# Altium PCB Brake_PCB_v2.PcbDoc
Units mm, origin at the board's own origin, x right, y up, seen from the top; angles counter-clockwise.
Board outline 86.5 x 99 mm, 2 copper layers (Top Layer, Bottom Layer); 48 components, 46 nets, 246 pads, 69 vias.
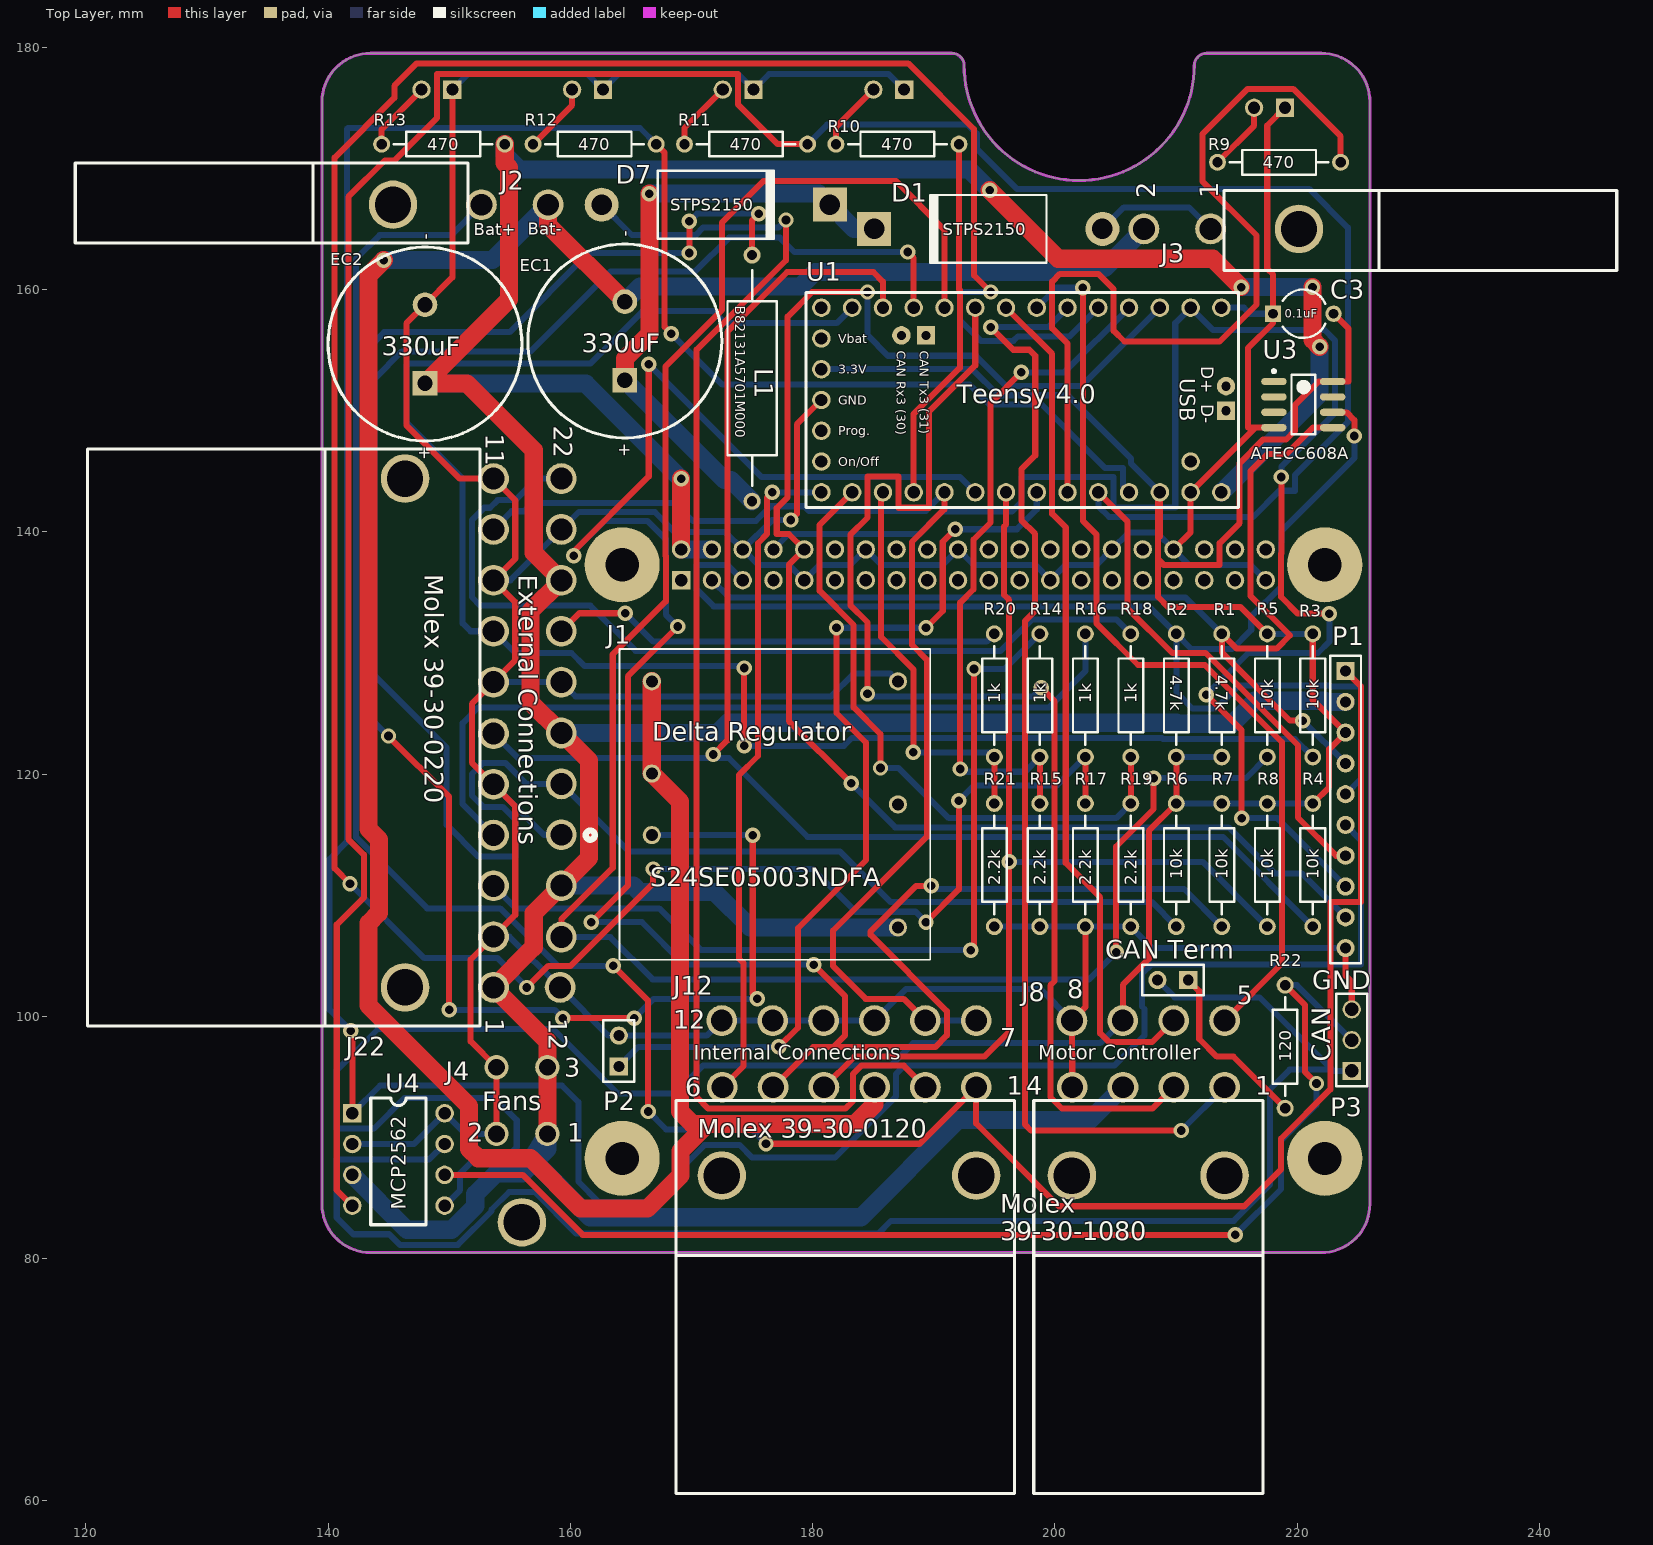
[diagram p0: Top Layer view]
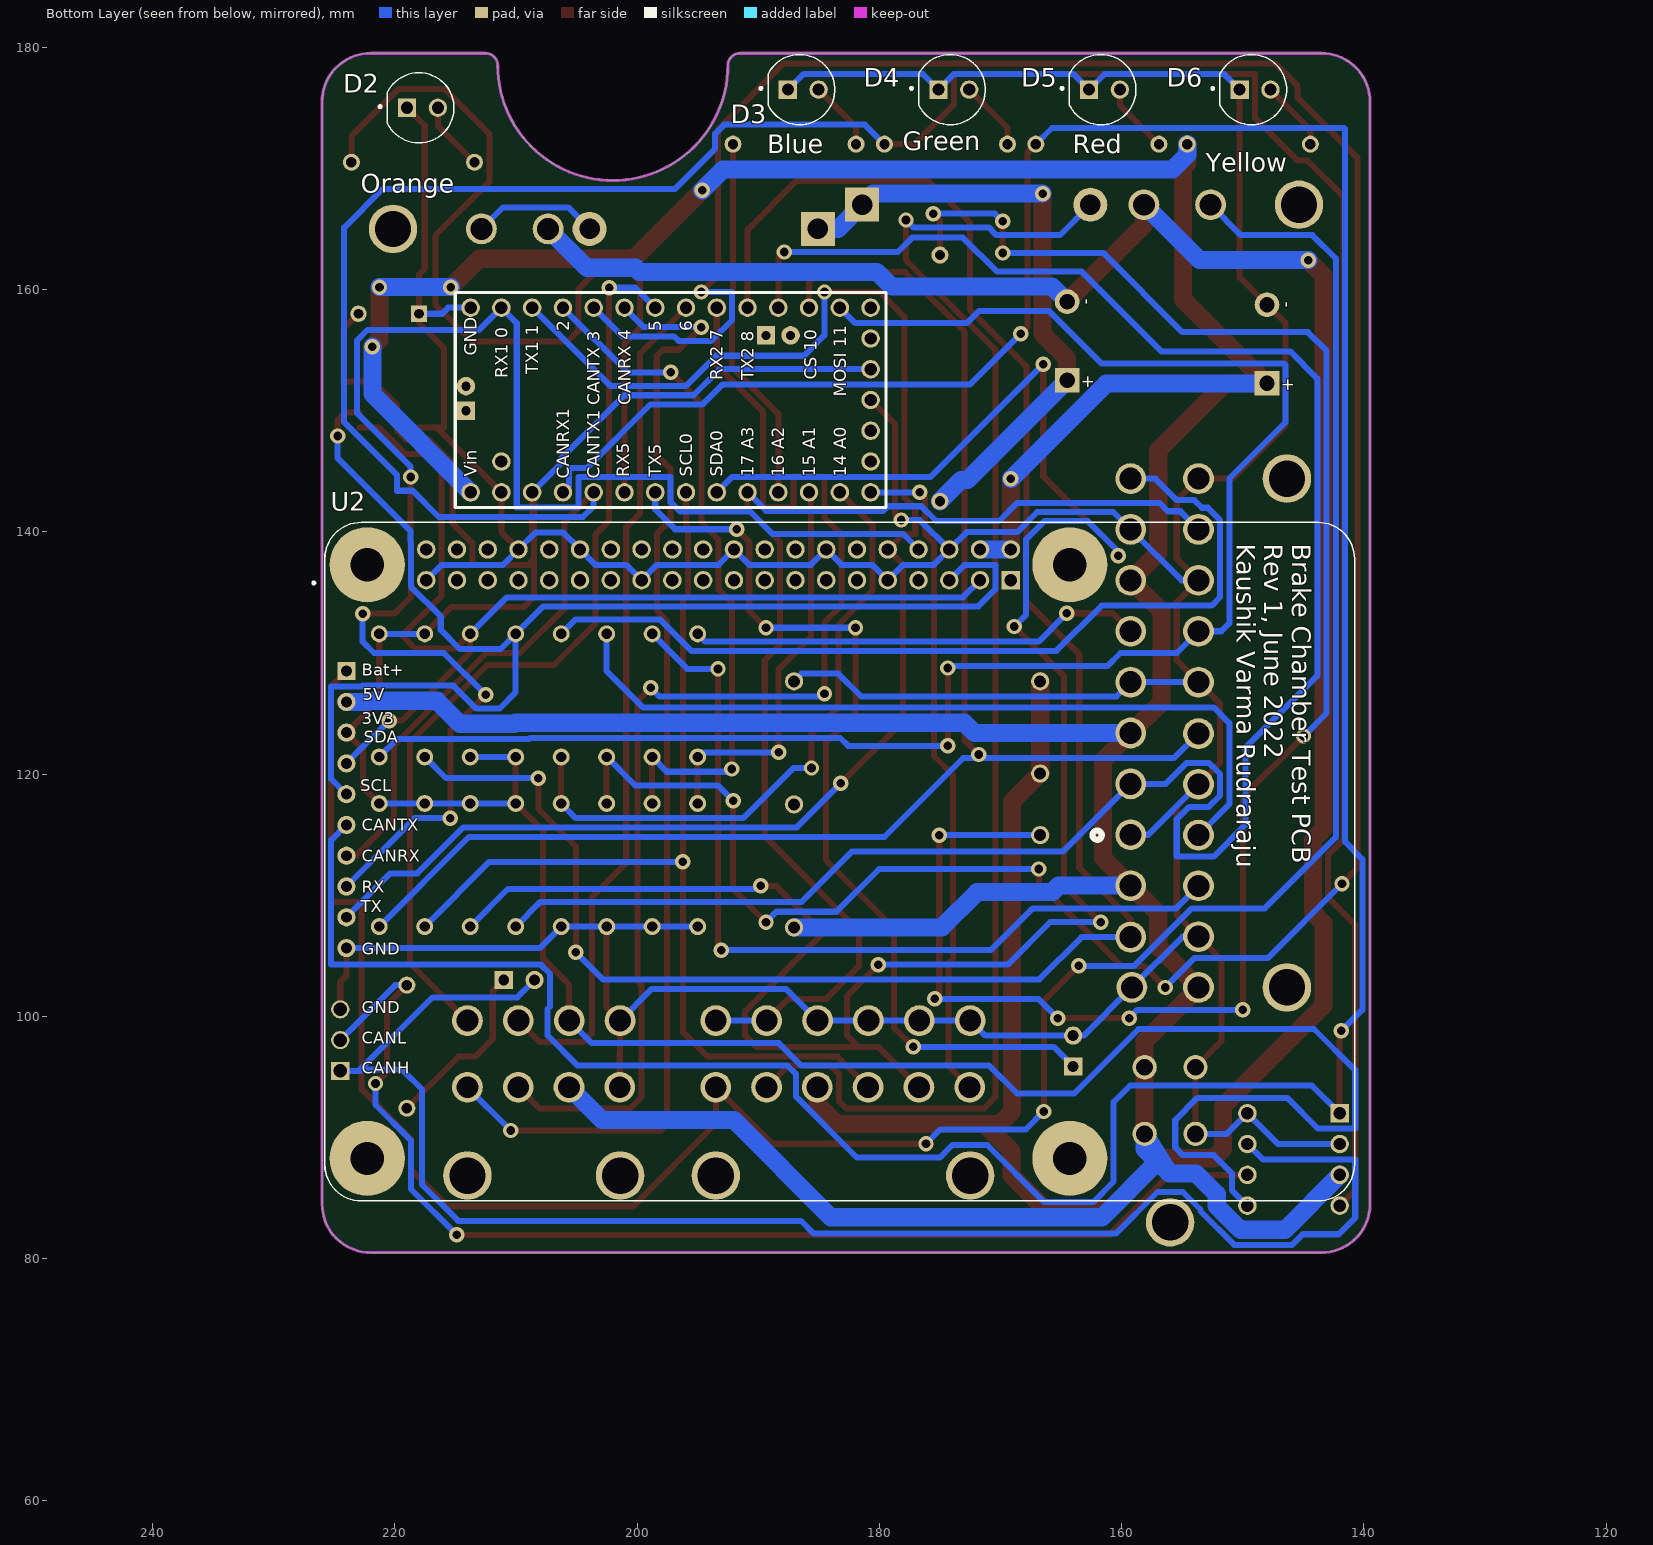
[diagram p1: Bottom Layer view, seen from below]

## Layer stack, top to bottom
Top Solder: solder mask 0.0102, Solder Resist, Dk 3.5
Top Layer: signal copper 0.0356
Dielectric 1: dielectric 0.32, FR-4, Dk 4.8
Bottom Layer: signal copper 0.0356
Bottom Solder: solder mask 0.0102, Solder Resist, Dk 3.5

## Board outline
139.5,84.5 139.5,175.5 cw(c143.5,175.5) 143.5,179.5 191.5,179.5 cw(c191.5,178.5) 192.5,178.5 ccw(c202,178.5) 211.5,178.5 cw(c212.5,178.5) 212.5,179.5 222,179.5 cw(c222,175.5) 226,175.5 226,84.504 225.996,84.504 cw(c221.996,84.504) 221.996,80.504 221.996,80.5 143.5,80.5 cw(c143.5,84.5)

## Design rules (kind name [scope] priority, off if disabled: settings)
Clearance [All] p1: gap=0.254 ignorepadtopadclearanceinfootprint=FALSE except(0: Arc-Hole Track-Hole SMDPad-Hole THPad-Hole Via-Hole Fill-Hole Poly-Hole Region-Hole Text-Hole)
PolygonConnect [All] p1: connectstyle=Relief reliefconductorwidth=0.254 reliefentries=4 polygonreliefangle="90 Angle" airgapwidth=0.254
RoutingVias [All] p1: holewidth=0.711 width=1.27 viastyle="Through Hole" minholewidth=0.711 minwidth=1.27 maxholewidth=0.711 maxwidth=1.27
SolderMaskExpansion [All] p1: expansion=0.102 istentingtop=FALSE
Width 5V [InNet('5V')] p1: maxlimit=2 minlimit=0.254 preferedwidth=1.5 minimp=50.000000 maximp=50.000000 favimp=50.000000
Width D12 [InNet('NetD1_2')] p2: maxlimit=2 minlimit=0.254 preferedwidth=1.5 minimp=50.000000 maximp=50.000000 favimp=50.000000
Width Bat- [InNet('Bat -')] p3: maxlimit=2 minlimit=0.254 preferedwidth=1.5 minimp=50.000000 maximp=50.000000 favimp=50.000000
Width [All] p4: maxlimit=0.75 minlimit=0.4 preferedwidth=0.5 minimp=50.000000 maximp=50.000000 favimp=50.000000
30 further rules are at their usual default settings.

## Components (designator, comment, footprint, x,y, rotation, side; value= is the part's Value field where it differs from the comment)
C3 "0.1uF" CAPR5-4X5 220.5,158 r0 top
"CAN Term" "Header 2" HDR1X2 211,103 r180 top
D1 "STPS2150" DO-201AD 194.5,165 r180 top
D2 "Orange" LED_151054RS03000 217.715,175 r180 bottom
D3 "Blue" LED_151054RS03000 186.282,176.5 r180 bottom
D4 "Green" LED_151054RS03000 173.85,176.5 r180 bottom
D5 "Red" LED_151054RS03000 161.417,176.5 r180 bottom
D6 "Yellow" LED_151054RS03000 148.985,176.5 r180 bottom
D7 "STPS2150" DO-201AD 172,167 r0 top
EC1 "330uF" "Cap - 15mm Polarized" 164.5,155.75 r90 top
EC2 "330uF" "Cap - 15mm Polarized" 148,155.5 r90 top
J1 "S24SE05003NDFA" CONN6_3NDFA_DEA 166.723,114.96 r0 top
J2 "Battery Power" "2 pos Mini-Fit Jr. R/A Header" 152.66,167 r270 top
J3 "Motor Power" "2 pos Mini-Fit Jr. R/A Header" 212.845,165 r90 top
J4 "Fans" "4 POS MINI-FIT JR" 158.1,90.3 r0 top
J8 "Motor Controller" "8 pos Mini-Fit Jr. R/A Header" 214,94.155 r0 top
J12 "Internal Connections" "12 pos Mini-Fit Jr. R/A Header" 193.5,94.155 r0 top
J22 "External Connections" "22 pos Mini-Fit Jr. R/A Header" 153.655,102.391 r270 top
L1 "B82131A5701M000" AXIAL-0.8 175,152.684 r270 top
P1 "Header 10" HDR1X10 223.992,128.5 r270 top
P2 "Header 2" HDR1X2 164,95.87 r90 top
P3 "Header 3" HDR1X3 224.5,95.5 r90 top
R1 "4.7k" AXIAL-0.4 213.773,126.494 r270 top value=10K
R2 "4.7k" AXIAL-0.4 210.019,126.494 r270 top value=10K
R3 "10k" AXIAL-0.4 221.283,126.494 r90 top value="10 K"
R4 "10k" AXIAL-0.4 221.283,112.494 r90 top value="10 K"
R5 "10k" AXIAL-0.4 217.528,126.494 r90 top value="10 K"
R6 "10k" AXIAL-0.4 210.019,112.494 r90 top value="10 K"
R7 "10k" AXIAL-0.4 213.773,112.494 r90 top value="10 K"
R8 "10k" AXIAL-0.4 217.528,112.494 r90 top value="10 K"
R9 "470" AXIAL-0.4 218.5,170.5 r0 top value="470 R"
R10 "470" AXIAL-0.4 187,172 r0 top value="470 R"
R11 "470" AXIAL-0.4 174.5,172 r0 top value="470 R"
R12 "470" AXIAL-0.4 162,172 r0 top value="470 R"
R13 "470" AXIAL-0.4 149.5,172 r0 top value="470 R"
R14 "1k" AXIAL-0.4 198.755,126.494 r90 top value=1K
R15 "2.2k" AXIAL-0.4 198.755,112.494 r90 top value="2.2 K"
R16 "1k" AXIAL-0.4 202.509,126.494 r90 top value=1K
R17 "2.2k" AXIAL-0.4 202.509,112.494 r90 top value="2.2 K"
R18 "1k" AXIAL-0.4 206.264,126.494 r90 top value=1K
R19 "2.2k" AXIAL-0.4 206.264,112.494 r90 top value="2.2 K"
R20 "1k" AXIAL-0.4 195,126.494 r90 top value=1K
R21 "2.2k" AXIAL-0.4 195,112.494 r90 top value="2.2 K"
R22 "120" AXIAL-0.4 219,97.5 r90 top
U1 "Teensy 4.0" "Teensy 4.0" 180.72,158.5 r270 top
U2 "RASPBERRYPI4_4GB" "Mirrored MODULE_RASPBERRY_PI_3_MODEL_B" 183.275,112.775 r180 bottom locked
U3 "ATECC608A" SOIC-8 220.5,150.5 r0 top
U4 "MCP2562" DIP8 141.999,92 r0 top

## Footprints (in the part's own frame and the unit in brackets; to place one, negate y for a bottom-side part, rotate by r counter-clockwise, add the part's x,y. Pads: shape width x height; smd on the part's side, far side on the other; paste and mask are expansions set on the pad)
"2 pos Mini-Fit Jr. R/A Header" [mm] "Molex 2 position Mini-Fit Jr. Right Angle Header with Pegs, Series 5569"
  round 4 hole 3: 0(0,-7.3)
  round 2.54 hole 1.803: 1(0,0) 2(0,5.5)
  silkscreen extent -3.43,-33.53 3.17,-1.1
"4 POS MINI-FIT JR" [mm] "Vertical Header"
  round 4 hole 3: 0(-2.1,-7.3)
  round 2 hole 1.4: 1(0,0) 2(-4.2,0) 3(0,5.5) 4(-4.2,5.5)
"8 pos Mini-Fit Jr. R/A Header" [mm] "Molex 8 position Mini-Fit Jr. Right Angle Header with Pegs, Series 5569"
  round 4 hole 3: 0(-12.6,-7.3) 0(0,-7.3)
  round 2.54 hole 1.803: 1(0,0) 2(-4.191,0) 3(-8.382,0) 4(-12.573,0) 5(0,5.5) 6(-4.2,5.5) 7(-8.4,5.5) 8(-12.6,5.5)
  silkscreen extent -15.75,-33.53 3.17,-1.1
"12 pos Mini-Fit Jr. R/A Header" [mil] "Molex 12 position Mini-Fit Jr. Right Angle Header with Pegs, Series 5569"
  round 157.48 hole 118.11: 0(-826.77,-287.4) 0(0,-287.4)
  round 100 hole 71: 1(0,0) 2(-165,0) 3(-330,0) 4(-495,0) 5(-660,0) 6(-825,0) 7(0,216.54) 8(-165.35,216.54) 9(-330.71,216.54) 10(-496.06,216.54) 11(-661.42,216.54) 12(-826.77,216.54)
  silkscreen extent -975,-1320 125,-43
"22 pos Mini-Fit Jr. R/A Header" [mil] "Molex 22 position Mini-Fit Jr. Right Angle Header with Pegs, Series 5569"
  round 157.48 hole 118.11: 0(-1653.54,-287.4) 0(0,-287.4)
  round 100 hole 71: 1(0,0) 2(-165,0) 3(-330,0) 4(-495,0) 5(-660,0) 6(-825,0) 7(-992.12,0) 8(-1157.48,0) 9(-1322.83,0) 10(-1488.19,0) 11(-1653.54,0) 12(0,216.54) 13(-163.58,220.47) 14(-330.71,220.47) 15(-496.06,220.47) 16(-661.42,220.47) 17(-826.77,220.47) 18(-992.12,220.47) 19(-1157.48,220.47) 20(-1322.83,220.47) 21(-1488.19,220.47) 22(-1653.54,220.47)
  silkscreen extent -1750,-1320 125,-43
AXIAL-0.4 [mm] "Axial Device, Thru-Hole; 2 Leads; 0.4 in Pin Spacing"
  round 1.4 hole 0.85: 1(-5.08,0) 2(5.08,0)
  silkscreen extent -4.06,-1.02 4.06,1.02
AXIAL-0.8 [mm] "Axial Device, Thru-Hole; 2 Leads; 0.8 in Pin Spacing"
  round 1.4 hole 0.85: 1(-10.16,0) 2(10.16,0)
  silkscreen extent -8.89,-2.03 8.89,2.03
"Cap - 15mm Polarized" [mil] "15 MM DIA ALUMINUM ELECTROLYTIC CAPACITOR w/ 7.5mm hole spacing"
  rect 80x80 hole 50: 1(-127.95,0)
  round 80 hole 50: 2(127.95,0)
  silkscreen extent -315,-315 315,315
CAPR5-4X5 [mm] "Capacitor; 2 Leads"
  rect 1.35x1.35 hole 0.8: 1(-2.5,0)
  round 1.35 hole 0.8: 2(2.5,0)
  silkscreen extent -1.69,-2 1.82,2
CONN6_3NDFA_DEA [mil]
  round 59 hole 39: 1(0,0) 2(0,200) 3(0,500) 4(800,500) 5(800,100) 6(800,-300)
  silkscreen extent -215,-405 905,605, body extent 0,0 10,10, height 10
DIP8 [mil]
  rect 60x60 hole 40: 1(0,0)
  round 60 hole 40: 2(0,-100) 3(0,-200) 4(0,-300) 5(300,-300) 6(300,-200) 7(300,-100) 8(300,0)
  silkscreen extent 60,-362 240,50
DO-201AD [mm] "Diode, Axial; Body 9.5 x 5.6 mm (LxDia. max), Lead Dia. 1.32 mm (max)"
  round 2.8 hole 1.7: 1(-9.42,0)
  rect 2.8x2.8 hole 1.7: 2(9.42,0)
  silkscreen extent -4.8,-2.8 4.9,2.8
HDR1X2 [mm] "Connector; Header; 2 Position"
  rect 1.5x1.5 hole 0.9: 1(0,0)
  round 1.5 hole 0.9: 2(2.54,0)
  silkscreen extent -1.27,-1.27 3.81,1.27
HDR1X3 [mm] "Connector; Header; 3 Position"
  rect 1.5x1.5 hole 1.1: 1(0,0)
  round 1.5 hole 1.1: 2(2.54,0) 3(5.08,0)
  silkscreen extent -1.27,-1.27 6.35,1.27
HDR1X10 [mm] "Connector; Header; 10 Position"
  rect 1.5x1.5 hole 0.9: 1(0,0)
  round 1.5 hole 0.9: 2(2.54,0) 3(5.08,0) 4(7.62,0) 5(10.16,0) 6(12.7,0) 7(15.24,0) 8(17.78,0) 9(20.32,0) 10(22.86,0)
  silkscreen extent -1.27,-1.27 24.13,1.27
LED_151054RS03000 [mm]
  round 1.508 hole 1: A(1.27,0)
  rect 1.508x1.508 hole 1: C(-1.27,0)
  silkscreen extent -3.6,-2.9 2.6,2.9
"Mirrored MODULE_RASPBERRY_PI_3_MODEL_B" [mil]
  rect 60x60 / inner round 60 / far side rect 60x60 hole 40: 1(556.3,914.57)
  round 60 hole 40: 2(556.3,1014.57) 3(456.3,914.57) 4(456.3,1014.57) 5(356.3,914.57) 6(356.3,1014.57) 7(256.3,914.57) 8(256.3,1014.57) 9(156.3,914.57) 10(156.3,1014.57) 11(56.3,914.57) 12(56.3,1014.57) 13(-43.7,914.57) 14(-43.7,1014.57) 15(-143.7,914.57) 16(-143.7,1014.57) 17(-243.7,914.57) 18(-243.7,1014.57) 19(-343.7,914.57) 20(-343.7,1014.57) 21(-443.7,914.57) 22(-443.7,1014.57) 23(-543.7,914.57) 24(-543.7,1014.57) 25(-643.7,914.57) 26(-643.7,1014.57) 27(-743.7,914.57) 28(-743.7,1014.57) 29(-843.7,914.57) 30(-843.7,1014.57) 31(-943.7,914.57) 32(-943.7,1014.57) 33(-1043.7,914.57) 34(-1043.7,1014.57) 35(-1143.7,914.57) 36(-1143.7,1014.57) 37(-1243.7,914.57) 38(-1243.7,1014.57) 39(-1343.7,914.57) 40(-1343.7,1014.57)
  round 244.09 hole 108.27: S1(-1535.43,964.57) S2(748.03,964.57) S3(748.03,-964.57) S4(-1535.43,-964.57)
  silkscreen extent -1713,-1102 1673,1102, body extent -1673,-1181 1783,1102, height 701
SOIC-8 [mm]
  oval 2.1x0.6 smd: 1(-2.425,1.905) 2(-2.425,0.635) 3(-2.425,-0.635) 4(-2.425,-1.905) 5(2.425,-1.905) 6(2.425,-0.635) 7(2.425,0.635) 8(2.425,1.905)
  silkscreen extent -2.55,-2.45 0.97,2.88
"Teensy 4.0" [mil] "32 bit Arduino Compatible Microcontroller www.pjrc.com/teensy"
  round 60 hole 40: 0(0,1200) 1(0,1100) 2(0,1000) 3(0,900) 3V3a(600,1100) 3V3b(200,0) 4(0,800) 5(0,700) 6(0,600) 7(0,500) 8(0,400) 9(0,300) 10(0,200) 11(0,100) 12(0,0) 13(600,0) 14(600,100) 15(600,200) 16(600,300) 17(600,400) 18(600,500) 19(600,600) 20(600,700) 21(600,800) 22(600,900) 23(600,1000) G1(0,1300) G2(600,1200) G3(300,0) On(500,0) P(400,0) VBat(100,0) Vin(600,1300) VUSB(500,1200)
  round 60 hole 30: CRX3(90,260) D+(255,1315)
  rect 60x60 hole 30: CTX3(90,340) D-(335,1315)
  silkscreen extent -50,-50 650,1355

## Part data
C3: library part Cap, "Capacitor"
"CAN Term" P2: "Header, 2-Pin"
  "CAN Term": LatestRevisionDate=17-Jul-2002, LatestRevisionNote="Re-released for DXP Platform.", Publisher="Altium Limited"
D1 D7: library part "Diode 1N5408", "DIODE SCHOTTKY 150V 2A DO15"
D2 D3 D4 D5 D6: library part 151054RS03000, "Red 623nm LED Indication - Discrete 1.9V Radial"
EC1 EC2: library part "Capacitor, Polarized", "CAP ALUM 220UF 20% 100V RADIAL", Manufacturer=Nichicon, PartNumber=UBT2A221MHD1TN, Supplier Part Number 1=493-4517-1-ND, Supplier 1=Digi-Key
J1: "No Description Available", PartNumber=S24SE05003NDFA
J2 J3: library part "2 Pos Header", Manufacturer="Voltage IN", PartNumber=39-30-1020, Supplier Part Number 1=538-39-30-1020, Supplier 1=Mouser
J4: library part "4 Pos Header Vert", "CONN HEADER 4POS 4.2MM VERT TIN", Manufacturer="Molex Exhaust fans", PartNumber=39-29-9040, Supplier 1=Digi-Key
J8: library part "8 Pos Header", "CONN HEADER 8POS 4.2MM R/A TIN", Manufacturer=Molex, PartNumber=39-30-1080, Supplier Part Number 1=WM21354-ND, Supplier 1=Digi-Key
J12: library part "12 Pos Header", Manufacturer=Molex, PartNumber=39-30-1120, Supplier 1=Digi-Key
J22: library part "22 Pos Header", Manufacturer=Molex, PartNumber=39-30-1220, Supplier 1=Digi-Key
L1: library part 8230-20-RC, "14 µH Unshielded Drum Core, Wirewound Inductor 700 mA 760mOhm Axial", PartNumber=8230-20-RC
P1: "Header, 10-Pin", LatestRevisionDate=17-Jul-2002, LatestRevisionNote="Re-released for DXP Platform.", Publisher="Altium Limited"
P3: "Header, 3-Pin", LatestRevisionDate=17-Jul-2002, LatestRevisionNote="Re-released for DXP Platform.", Publisher="Altium Limited"
R1 R2 R3 R4 R5 R6 R7 R8 R9 R10 R11 R12 R13 R14 R15 R16 R17 R18 R19 R20 R21 R22: library part Res1, "Resistor"
U1: library part Teensy_4.0, "32 Bit Arduino-Compatible iMX Microcontroller", Manufacturer=PRJC, Supplier Part Number 1=1568-DEV-15583-ND, PartNumber="Teensy 4.0", Supplier 1=Digi-Key
U2: "BCM2711 Raspberry Pi 4 Model B 4GB - ARMÂ® CortexÂ®-A72 MPU Embedded Evaluation Board"
U3: library part ATECC508A, "Authentication Chip IC Networking and Communications 8-SOIC", Manufacturer="Microchip Technology", PartNumber=ATECC508A-SSHDA-T, Supplier Part Number 1=ATECC508A-SSHDA-TCT-ND, Supplier 1=Digi-Key
U4: library part MCP2551, Supplier 1=Digi-Key

## Via types
v1: diameter 1.27, hole 0.711, Top Layer to Bottom Layer, 69 vias

## Nets (pads, with @x,y where several pads share a name; then routed paths per layer and width w, separated by ;. In a path a pad name is that pad's centre, name@x,y a point inside that pad or via, vN(x,y) a via of type N, cw(c..) or ccw(c..) an arc to the next point about the centre after c; other vN are vias at no path point)
3V3: C3.2 J8.7 P1.3 R1.2 R2.2 R3.2 R4.2 R5.2 R6.2 R7.2 R8.2 U1.3V3a U1.3V3b U3.8 U4.5 | length 250.9
  Top Layer w0.5: J8.7 205.6,102.605 207.751,104.756 207.751,115.306 R6.2 R2.2 ; R5.2 215.32,133.782 209.353,133.782 208.515,134.62 208.515,137.726 ; R4.2 222.631,118.923 222.631,122.059 P1.3 221.283,126.13 R3.2 ; C3.2 224.215,156.785 224.215,152.405 U3.8 221.767,152.405 219.808,150.446 219.808,148.334 219.075,147.601 217.17,147.601 215.24,145.671 215.24,140.714 213.591,139.065 213.591,137.275 208.966,137.275 208.515,137.726 ; 208.515,137.726 208.515,139.471 ; 208.515,139.471 208.515,140.03 208.509,140.037 208.509,143.26 U1.3V3a 208.66,139.616 208.515,139.471
  Bottom Layer w0.5: U4.5 150.901,85.662 150.901,87.046 152.4,88.544 154.94,88.544 155.575,89.179 155.575,91.44 153.746,93.269 146.329,93.269 143.789,90.729 140.716,90.729 140.716,95.555 144.12,98.958 158.598,98.958 163.921,93.635 168.633,93.635 170.934,95.936 186.437,95.936 188.291,97.79 203.735,97.79 J8.7 ; U1.3V3b 193.187,153.42 195.338,151.269 201.052,151.269 206.287,146.034 206.287,145.633 U1.3V3a ; R6.2 R7.2 R8.2 R4.2 ; R2.2 R1.2 ; R5.2 R3.2
5V: EC2.1 J1.6 J4.1 J4.3 J8.3 J22.1 J22.14 J22.17 J22.20 P1.2 R13.2 U1.Vin U2.2 U2.4 U4.3 | length 401.5
  Top Layer w1.5: R13.2 154.58,170.434 154.94,170.074 154.94,159.19 EC2.1 151.46,152.25 156.972,146.738 156.972,138.274 J22.20 156.718,133.454 156.718,125.928 J22.17 161.544,121.102 161.544,113.08 J22.14 156.972,108.508 156.972,105.708 J22.1 158.1,97.946 J4.3 J4.1 ; U2.2 v1(169.145,144.374) ; v1(194.624,168.19) 200.27,162.544 213.02,162.544 v1(215.367,160.198) ; v1(221.259,160.198) 221.259,155.854 v1(221.844,155.27)
  Bottom Layer w1.5: U4.3 146.534,82.385 150.185,82.385 152.153,84.353 152.153,85.33 153.856,87.032 156.062,87.032 ; EC2.1 161.269,152.25 v1(169.145,144.374) ; R13.2 154.58,171.124 155.793,169.911 192.902,169.911 v1(194.624,168.19) ; J22.14 165.2,110.791 165.717,110.274 171.916,110.274 174.85,107.34 J1.6 ; J22.17 172.147,123.391 172.99,124.234 210.019,124.234 210.103,124.15 214.598,124.15 216.497,126.048 222.226,126.048 222.314,125.96 P1.2 ; U2.2 U2.4 ; J8.3 202.903,91.44 192.004,91.44 183.981,83.417 161.632,83.417 157.039,88.01 ; U1.Vin 221.844,151.364 v1(221.844,155.27) ; v1(215.367,160.198) v1(221.259,160.198) ; 156.062,87.032 157.039,88.01 ; 156.062,87.032 J4.1 158.1,89.07 157.039,88.01
"Bat +": J2.1 J12.1 P1.1 | length 207
  Top Layer w0.5: v1(163.551,104.165) 166.421,101.295 v1(166.421,92.151) ; v1(176.149,89.484) 188.829,89.484 J12.1 193.5,91.158 200.33,84.328 215.621,84.328 218.671,87.378 218.671,89.918 222.733,93.98 222.733,109.449 225.247,109.449 225.247,127.245 P1.1
  Bottom Layer w0.5: J2.1 150.156,164.496 144.252,164.496 142.316,162.56 142.316,114.783 148.184,108.915 154.203,108.915 158.953,104.165 v1(163.551,104.165) ; v1(166.421,92.151) 167.894,90.678 174.955,90.678 v1(176.149,89.484)
"Bat -": EC1.2 J1.2 J1.3 J2.2 J3.2 J12.3 | length 230.3
  Top Layer w1.5: v1(144.602,162.422) 143.332,161.152 143.332,115.479 144.201,114.61 144.201,108.554 143.332,107.685 143.332,100.889 151.638,92.583 151.638,89.052 152.4,88.29 156.693,88.29 160.833,84.15 166.37,84.15 169.084,86.864 169.084,88.9 171.311,91.127 ; J2.2 158.16,165.34 EC1.2 ; J1.3 J1.2 169.037,117.726 169.037,92.151 170.061,91.127 171.311,91.127 ; J12.3 185.118,92.73 183.515,91.127 171.311,91.127
  Bottom Layer w1.5: v1(144.602,162.422) 153.582,162.422 J2.2 ; EC1.2 165.737,160.237 179.007,160.237 180.213,161.442 199.782,161.442 200.13,161.79 204.135,161.79 J3.2
Blue: R10.2 U1.16 | length 30.3
  Top Layer w0.5: U1.16 188.34,149.732 192.151,153.543 192.151,159.944 192.08,160.015 R10.2
CANH: "CAN Term.2" P3.1 U4.7 | length 130.1
  Bottom Layer w0.5: U4.7 148.348,88.189 140.716,88.189 140.716,83.388 142.088,82.017 145.034,82.017 145.92,81.131 150.704,81.131 153.492,83.919 153.492,84.056 154.94,85.504 157.037,85.504 160.474,82.067 185.42,82.067 186.465,83.112 214.761,83.112 217.754,86.106 217.754,93.98 219.379,95.605 222.733,95.605 222.837,95.5 222.961,95.5 ; 208.46,103 209.885,101.575 216.886,101.575 222.961,95.5 ; P3.1 222.961,95.5
CANL: P3.2 R22.2 U4.6 | length 99.2
  Top Layer w0.5: U4.6 156.057,86.92 161.011,81.966 v1(214.884,81.966) ; R22.2 220.624,100.955 220.624,95.428 v1(221.59,94.463)
  Bottom Layer w0.5: v1(214.884,81.966) 218.669,85.75 218.669,89.765 221.59,92.686 v1(221.59,94.463) ; R22.2 219.96,102.58 P3.2
"Displacement Reset": J12.6 U1.13 | length 55.2
  Top Layer w0.5: J12.6 174.295,95.905 174.295,104.394 173.914,104.775 173.914,119.913 175.491,121.491 175.491,139.067 176.225,139.802 176.225,142.824 v1(176.657,143.256)
  Bottom Layer w0.5: v1(176.657,143.256) 176.661,143.26 U1.13
"Encoder A": R14.1 R15.2 U1.2 | length 57
  Top Layer w0.5: v1(192.176,120.421) 192.176,134.152 193.279,135.255 193.279,139.355 194.691,140.767 194.691,150.622 v1(197.231,153.162) ; R15.2 R14.1
  Bottom Layer w0.5: v1(192.176,120.421) 192.405,120.193 197.533,120.193 R14.1 ; v1(197.231,153.162) 200.782,153.162 U1.2
"Encoder A IN": J22.3 R14.2 | length 71.6
  Top Layer w0.5: v1(193.04,105.461) 193.319,105.74 v1(193.319,128.679)
  Bottom Layer w0.5: J22.3 155.506,108.922 167.328,108.922 170.79,105.461 v1(193.04,105.461) ; v1(193.319,128.679) 195.859,128.679 R14.2
"Encoder B": R16.1 R17.2 U1.3 | length 236
  Top Layer w0.5: v1(141.808,110.947) 140.538,112.217 140.538,170.891 145.466,175.819 145.466,176.809 147.32,178.664 187.884,178.664 193.319,173.228 193.319,161.163 v1(194.691,159.791) ; v1(156.413,102.387) 158.191,104.165 160.02,104.165 166.827,110.973 v1(166.827,112.166) ; v1(189.357,107.772) 192.075,110.49 v1(192.075,117.805) ; R17.2 R16.1
  Bottom Layer w0.5: v1(141.808,110.947) 147.955,104.8 154,104.8 v1(156.413,102.387) ; v1(166.827,112.166) 180.018,112.166 183.549,108.636 188.493,108.636 v1(189.357,107.772) ; v1(192.075,117.805) 193.345,119.075 200.17,119.075 R16.1 ; v1(194.691,159.791) 192.151,159.791 192.151,157.48 193.878,155.753 196.571,155.753 196.952,156.134 201.214,156.134 U1.3
"Encoder B IN": J22.4 R16.2 | length 66.6
  Bottom Layer w0.5: J22.4 151.105,117.514 151.105,124.206 152.4,125.501 199.517,125.501 202.509,128.494 R16.2
Extra: P2.1 U1.20 | length 77.8
  Top Layer w0.5: v1(177.216,97.485) 178.791,99.06 178.791,107.29 184.404,112.903 184.404,122.603 181.966,125.041 v1(181.966,132.08) ; v1(189.357,132.08) 190.739,133.462 190.739,139.177 v1(191.77,140.208)
  Bottom Layer w0.5: P2.1 165.615,97.485 v1(177.216,97.485) ; v1(181.966,132.08) v1(189.357,132.08) ; v1(191.77,140.208) 196.85,140.208 198.5,141.858 U1.20
GND: C3.1 D2.C D3.C D4.C D5.C D6.C EC2.2 J1.4 J4.2 J4.4 J8.4 J8.8 J12.9 J12.10 J12.11 J12.12 J22.2 J22.5 J22.7 J22.9 J22.11 J22.12 J22.15 J22.18 J22.21 P1.10 P2.2 P3.3 R15.1 R17.1 R19.1 R21.1 U1.G1 U1.G2 U1.G3 U2.6 U2.9 U2.14 U2.20 U2.25 U2.30 U2.34 U2.39 U3.4 U4.2 U4.8 | length 437.1
  Top Layer w0.5: D6.C 150.255,161.005 EC2.2 146.456,157.207 146.456,148.793 150.859,144.391 J22.11 155.448,142.598 155.448,137.784 J22.9 155.448,134.198 155.448,129.384 J22.7 151.867,125.803 151.867,120.943 J22.5 155.448,117.362 155.448,108.375 J22.2 151.765,104.692 151.765,97.935 J4.4 J4.2 ; v1(178.181,140.97) 178.7,141.489 178.7,148.86 U1.G3 ; J8.4 201.427,96.876 201.4,96.903 J8.8 202.509,100.764 R17.1 ; U2.34 211.2,139.96 U1.G2 216.535,148.595 ; U3.4 216.535,148.595 ; D2.C 217.526,173.541 217.526,161.714 218,161.239 C3.1 218,157.226 215.951,155.177 215.951,148.595 216.535,148.595 ; P1.10 223.992,103.352 224.5,102.845 P3.3
  Bottom Layer w0.5: U4.2 147.08,89.46 U4.8 151.319,90.3 J4.2 ; D6.C 151.529,177.775 161.413,177.775 D5.C 163.962,177.775 173.845,177.775 D4.C 176.394,177.775 186.278,177.775 D3.C ; J22.2 154.964,106.582 J22.12 163.136,98.41 P2.2 171.255,98.41 J12.12 J12.11 J12.10 J12.9 187.713,102.268 198.787,102.268 J8.8 ; J22.5 157.819,114.991 J22.15 ; J22.7 J22.18 160.439,126.407 181.511,126.407 183.39,128.286 186.417,128.286 J1.4 ; J22.9 155.055,135.991 J22.21 160.697,141.633 166.979,141.633 168.633,139.979 172.791,139.979 U2.6 ; v1(178.181,140.97) 176.65,140.97 U2.6 ; R21.1 R15.1 R17.1 R19.1 208.038,105.64 P1.10 ; U1.G1 215.595,158.5 216.095,158 C3.1 ; U2.39 216.135,137.275 211.055,137.275 U2.34 208.401,139.929 206.089,139.929 U2.30 203.435,137.275 200.895,137.275 U2.25 198.359,137.271 193.279,137.271 U2.20 190.735,137.275 185.655,137.275 U2.14 183.111,137.271 180.571,137.271 U2.9 178.039,137.271 175.499,137.271 U2.6
Green: R9.2 U1.21 | length 73.3
  Top Layer w0.5: U1.21 201.04,155.525 199.771,156.794 199.771,160.655 200.406,161.29 203.581,161.29 204.851,160.02 204.851,156.595 205.74,155.706 213.593,155.706 216.637,158.75 216.637,164.465 212.192,168.91 212.192,172.847 215.9,176.555 219.659,176.555 223.58,172.635 R9.2
"Limit Apply": J22.13 R5.1 U1.8 | length 166.3
  Top Layer w0.5: J22.13 159.255,108.017 163.5,112.262 163.5,129.885 167.879,134.265 167.879,137.145 167.894,137.16 167.894,137.998 167.869,138.024 167.869,153.653 172.512,158.296 172.512,165.509 175.964,168.961 186.868,168.961 190.88,164.949 U1.8 ; v1(205.054,105.283) 205.054,114.021 208.153,117.119 v1(208.153,119.659)
  Bottom Layer w0.5: J22.13 163.304,106.546 166.802,103.048 202.819,103.048 v1(205.054,105.283) ; v1(208.153,119.659) 215.773,119.659 R5.1
"Limit Apply Safety": J22.8 R3.1 U1.11 | length 141.9
  Top Layer w0.5: v1(174.346,122.326) v1(174.346,128.753)
  Bottom Layer w0.5: v1(174.346,122.326) 182.577,122.326 183.231,122.98 208.849,122.98 208.934,122.896 219.801,122.896 R3.1 ; v1(174.346,128.753) 174.168,128.93 161.163,128.93 160.096,129.997 155.449,129.997 J22.8 151.765,131.791 151.105,132.451 151.105,144.397 146.48,149.022 146.48,153.77 146.608,153.899 161.671,153.899 166.014,158.242 171.755,158.242 172.771,157.226 181.986,157.226 U1.11
"Limit Retract": J22.16 R6.1 U1.9 | length 173.5
  Top Layer w0.5: v1(187.858,163.093) 188.34,162.612 U1.9
  Bottom Layer w0.5: v1(187.858,163.093) 178.486,163.093 177.292,164.287 173.101,164.287 170.305,161.491 163.32,161.491 156.718,154.889 146.091,154.889 143.84,152.639 143.84,128.128 149.78,122.188 149.78,115.803 152.4,113.182 155.448,113.182 155.448,116.259 154.409,117.298 152.806,117.298 151.881,118.223 151.881,120.015 152.795,120.929 154.636,120.929 156.374,119.191 J22.16 164.832,113.614 182.244,113.614 186.409,109.449 207.984,109.449 R6.1
"Limit Retract Safety": J22.6 R4.1 U1.10 | length 127.3
  Top Layer w0.5: v1(171.78,121.615) 172.959,122.794 172.959,156.5 177.902,161.442 185.013,161.442 185.8,160.655 U1.10
  Bottom Layer w0.5: J22.6 155.691,121.31 v1@171.78,121.31 ; v1(171.78,121.615) v1@171.78,121.31 ; R4.1 213.889,114.808 179.596,114.808 173.094,121.31 v1@171.78,121.31
"Limit Stop": J12.7 J12.8 J22.10 U1.17 | length 97.7
  Top Layer w0.5: J12.8 187.507,101.448 184.379,101.448 181.686,104.14 181.686,107.086 189.459,114.859 189.459,129.408 188.199,130.668 188.199,139.168 190.88,141.849 U1.17
  Bottom Layer w0.5: J22.10 155.158,141.694 156.183,141.694 156.876,142.387 168.618,142.387 170.111,140.894 175.316,140.894 176.531,142.109 179.305,142.109 179.694,141.72 189.34,141.72 U1.17 ; J12.8 J12.7
"Motor Apply": J12.5 R7.1 U1.18 | length 181.6
  Top Layer w0.5: v1(160.274,138.024) 160.274,138.371 166.472,144.568 v1(166.472,153.822) ; v1(161.722,107.772) 164.744,110.795 164.744,128.067 v1(168.859,132.182) ; J12.5 177.571,94.99 180.041,97.46 181.712,97.46 ; v1(180.086,104.267) 182.677,101.676 182.677,98.425 181.712,97.46 ; v1(189.789,110.769) 188.544,110.769 184.785,107.01 184.785,106.731 191.084,100.432 191.084,98.425 190.119,97.46 181.712,97.46
  Bottom Layer w0.5: v1(160.274,138.024) 160.274,138.371 162.782,140.879 166.37,140.879 167.879,139.37 167.879,138.021 167.894,138.006 167.894,137.058 167.879,137.043 167.879,133.162 v1(168.859,132.182) ; v1(161.722,107.772) 165.913,107.772 169.418,104.267 v1(180.086,104.267) ; v1(166.472,153.822) 175.768,144.526 192.154,144.526 U1.18 ; v1(189.789,110.769) 190.042,110.516 210.671,110.516 R7.1
"Motor Controller AN1": J8.5 U1.5 | length 77
  Top Layer w0.5: v1(202.311,160.147) 202.311,140.894 203.439,139.766 203.439,132.425 206.858,129.007 212.369,129.007 218.745,122.631 218.745,104.4 J8.5
  Bottom Layer w0.5: U1.5 200.147,160.147 v1(202.311,160.147)
"Motor Controller AN2": J8.6 U1.6 | length 70.2
  Top Layer w0.5: U1.6 199.771,154.689 199.771,141.48 200.891,140.36 200.891,112.672 203.733,109.83 203.733,98.603 204.47,97.866 208.011,97.866 J8.6
"Motor Controller IN1": J8.1 U1.4 | length 94.6
  Top Layer w0.5: v1(194.691,156.896) 196.559,155.028 197.88,155.028 198.374,154.534 198.374,146.304 197.231,145.161 197.231,140.955 198.359,139.827 198.359,133.477 197.536,132.654 197.536,91.059 198.018,90.576 v1(210.421,90.576)
  Bottom Layer w0.5: v1(194.691,156.896) 199.436,156.896 U1.4 ; v1(210.421,90.576) J8.1
"Motor Controller IN2": J8.2 U1.7 | length 105.3
  Top Layer w0.5: v1(184.531,126.644) 184.531,132.512 183.119,133.924 183.119,139.766 184.531,141.178 184.531,144.551 187.071,144.551 187.071,141.986 189.611,141.986 189.611,149.936 193.42,153.745 U1.7 ; v1(198.869,127.114) 199.974,126.009 199.974,102.921 199.619,102.565 199.619,93.345 200.584,92.38 208.034,92.38 J8.2
  Bottom Layer w0.5: v1(184.531,126.644) 184.785,126.39 198.145,126.39 v1(198.869,127.114)
"Motor Retract": J12.4 R8.1 U1.19 | length 85.5
  Top Layer w0.5: J12.4 183.455,96.683 194.168,96.683 196.215,98.73 v1(196.215,112.751) 196.215,134.377 195.811,134.781 195.811,140.437 195.96,140.586 U1.19
  Bottom Layer w0.5: v1(196.215,112.751) 212.191,112.751 R8.1
"MotorBat +": D1.1 J3.1 | length 10.4
  Bottom Layer w0.5: D1.1 205.696,166.776 211.069,166.776 J3.1
"NetCAN Term_1": "CAN Term.1" R22.1 | length 14.7
  Top Layer w0.5: 211,103 211.912,102.088 211.912,98.131 213.36,96.683 214.736,96.683 R22.1
NetD1_2: D1.2 D7.2 EC1.1 L1.2 | length 50.7
  Top Layer w1.5: EC1.1 164.5,154.317 166.52,156.337 v1(166.52,167.919)
  Bottom Layer w1.5: EC1.1 172.72,144.28 173.244,144.28 L1.2 ; v1(166.52,167.919) 180.501,167.919 D7.2 183.42,165 D1.2
NetD2_A: D2.A R9.1 | length 5.8
  Top Layer w0.5: R9.1 216.445,173.525 D2.A
NetD3_A: D3.A R10.1 | length 5.8
  Top Layer w0.5: R10.1 181.92,173.408 D3.A
NetD4_A: D4.A R11.1 | length 5.8
  Top Layer w0.5: R11.1 169.42,173.34 D4.A
NetD5_A: D5.A R12.1 | length 5.8
  Top Layer w0.5: R12.1 160.147,175.227 D5.A
NetD6_A: D6.A R13.1 | length 5.9
  Top Layer w0.5: R13.1 144.42,173.205 D6.A
NetJ1_1: J1.1 L1.1 | length 148
  Top Layer w0.5: v1(144.983,123.139) 149.987,118.135 v1(149.987,100.533) ; v1(159.385,99.847) v1(165.278,99.847) ; v1(169.824,163.017) v1(169.824,165.633) ; L1.1 175,165.704 v1(175.565,166.268) ; v1(175.057,114.96) 175.057,101.829 v1(175.438,101.448)
  Bottom Layer w0.5: v1(144.983,123.139) 143.078,125.044 143.078,154.94 144.628,156.489 154.991,156.489 161.519,163.017 v1(169.824,163.017) ; v1(149.987,100.533) 158.699,100.533 v1(159.385,99.847) ; v1(165.278,99.847) 166.878,101.448 v1(175.438,101.448) ; J1.1 v1(175.057,114.96) ; v1(169.824,165.633) 170.459,166.268 v1(175.565,166.268)
Orange/CANRX: P1.7 R11.2 U1.22 U4.4 | length 265.6
  Top Layer w0.5: U4.4 140.716,85.663 140.716,107.577 142.947,109.808 142.947,113.356 141.677,114.626 141.677,167.64 144.696,170.659 145.487,170.659 148.996,174.168 148.996,177.775 173.85,177.775 173.85,175.26 177.11,172 R11.2 ; U1.22 205.979,140.861 205.979,133.706 209.688,129.997 212.446,129.997 220.066,122.377 220.066,116.413 223.218,113.26 P1.7
  Bottom Layer w0.5: R11.2 181.189,173.609 192.811,173.609 193.548,172.872 193.548,171.602 196.85,168.3 220.98,168.3 224.18,165.1 224.18,149.047 219.833,144.7 219.833,143.387 218.52,143.387 216.357,141.224 204.47,141.224 203.58,142.114 U1.22
SCL: P1.5 R2.1 U2.5 U3.6 | length 108.6
  Top Layer w0.5: U3.6 224.074,149.865 224.714,149.225 v1(224.714,147.904)
  Bottom Layer w0.5: U2.5 172.955,137.275 170.419,137.275 170.419,135.255 171.837,133.837 207.756,133.837 R2.1 ; P1.5 225.247,119.595 225.247,127.229 222.733,127.229 222.656,127.305 215.163,127.305 213.262,125.404 211.353,125.404 210.019,126.739 R2.1 ; v1(224.714,147.904) 224.714,146.081 218.694,140.061 218.669,138.201 218.671,136.529 218.671,135.481 216.205,133.014 216.205,131.902 214.63,130.327 211.265,130.327 R2.1
SDA: P1.4 R1.1 U2.3 U3.5 | length 89.2
  Top Layer w0.5: v1(220.463,124.409) 219.405,124.409 213.773,130.041 R1.1 214.995,130.353 218.303,130.353 219.405,131.455 216.139,134.722 216.139,145.015 217.555,146.431 219.121,146.431 221.285,148.595 U3.5
  Bottom Layer w0.5: U2.3 173.099,134.591 210.756,134.591 R1.1 ; v1(220.463,124.409) P1.4
"Service Pressure": R20.1 R21.2 U1.15 | length 33.4
  Top Layer w0.5: U1.15 185.649,143.26 185.649,140.972 185.651,140.97 185.651,131.316 188.316,128.651 v1(188.316,121.793) ; R21.2 R20.1
  Bottom Layer w0.5: v1(188.316,121.793) 194.621,121.793 R20.1
"Service Pressure IN": J22.19 R20.2 | length 37.6
  Top Layer w0.5: J22.19 160.738,133.274 v1(164.516,133.274)
  Bottom Layer w0.5: v1(164.516,133.274) 166.849,130.941 194.367,130.941 R20.2
"Supply Pressure": R18.1 R19.2 U1.14 | length 52.7
  Top Layer w0.5: U1.14 180.579,140.579 180.579,135.118 183.388,132.309 183.388,125.505 185.598,123.296 v1(185.598,120.498) ; R19.2 R18.1
  Bottom Layer w0.5: v1(185.598,120.498) 187.096,120.498 191.237,116.357 205.047,116.357 R19.2
"Supply Pressure IN": J22.22 R18.2 | length 73
  Bottom Layer w0.5: J22.22 157.218,144.391 155.448,142.621 154,142.621 153.365,141.986 152.883,141.986 151.867,140.97 151.867,134.62 152.578,133.909 161.646,133.909 165.379,130.175 195.517,130.175 198.12,132.778 205.06,132.778 R18.2
"SwitchedBat +": D7.1 J12.2 | length 115
  Top Layer w0.5: v1(177.8,165.735) 177.8,162.409 170.419,155.028 170.419,93.345 171.383,92.381 182.703,92.381 183.337,93.015 183.337,95.25 184.016,95.929 187.535,95.929 J12.2
  Bottom Layer w0.5: D7.1 165.086,164.494 170.333,164.494 170.963,165.125 177.19,165.125 v1(177.8,165.735)
"UART-RX from Teensy": P1.8 U1.0 U2.8 | length 133.6
  Top Layer w0.5: v1(212.496,126.543) 215.417,123.622 v1(215.417,116.357) ; v1(218.694,144.526) 218.694,138.227 218.669,138.201 218.669,136.532 218.671,136.529 218.671,134.62 220.043,133.248 v1(222.656,133.248)
  Bottom Layer w0.5: U2.8 178.047,139.827 188.824,139.827 190.678,141.681 196.469,141.681 197.231,142.443 197.231,144.526 204.826,144.526 204.826,143.713 204.851,143.688 204.851,141.994 209.931,141.994 209.931,157.231 U1.0 213.033,156.667 222.25,156.667 223.114,155.804 223.114,149.797 218.694,145.378 v1(218.694,144.526) ; v1(212.496,126.543) 215.951,129.997 221.717,129.997 222.656,130.937 v1(222.656,133.248) ; v1(215.417,116.357) 218.355,116.357 P1.8
"UART-TX from Teensy": P1.9 U1.1 U2.10 | length 128
  Top Layer w0.5: v1(183.185,119.228) 178.039,124.373 178.039,137.279 U2.10 178.048,139.802 177.038,139.802 177.038,141.961 177.927,142.85 177.927,157.759 179.959,159.791 v1(184.531,159.791)
  Bottom Layer w0.5: v1(183.185,119.228) 186.817,115.595 214.332,115.595 218.13,111.798 220.374,111.798 P1.9 ; v1(184.531,159.791) 184.531,156.21 186.207,154.534 193.476,154.534 195.986,152.023 202.183,152.023 U1.1
Yellow/CANTX: P1.6 R12.2 U1.23 U4.1 | length 286.4
  Top Layer w0.5: v1(141.859,98.806) 142,98.665 U4.1 ; R12.2 167.774,171.306 167.774,156.921 v1(168.333,156.362)
  Bottom Layer w0.5: v1(141.859,98.806) 140.131,100.534 140.131,112.979 141.554,114.402 141.554,173.253 141.63,173.33 165.75,173.33 R12.2 ; U4.1 144.284,94.285 159.309,94.285 160.671,92.923 160.671,86.36 162.36,84.671 166.37,84.671 171.082,89.383 173.965,89.383 175.002,88.345 181.843,88.345 186.893,93.396 186.893,95.25 187.579,95.936 204.902,95.936 207.391,98.425 207.391,100.609 207.188,100.813 207.188,103.505 207.95,104.267 225.247,104.267 225.247,114.545 P1.6 ; v1(168.333,156.362) 172.549,152.146 192.953,152.146 194.584,150.515 198.887,150.515 204.122,145.28 205.6,145.28 205.6,143.78 U1.23
pads on no net: J1.5 J2.0 J3.0 J4.0 J8.0 J12.0 J22.0 U1.12 U1.CRX3 U1.CTX3 U1.D+ U1.D- U1.On U1.P U1.VBat U1.VUSB U2.1 U2.7 U2.11 U2.12 U2.13 U2.15 U2.16 U2.17 U2.18 U2.19 U2.21 U2.22 U2.23 U2.24 U2.26 U2.27 U2.28 U2.29 U2.31 U2.32 U2.33 U2.35 U2.36 U2.37 U2.38 U2.40 U2.S1 U2.S2 U2.S3 U2.S4 U3.1 U3.2 U3.3 U3.7

## Polygon pours and split planes (outlines as drawn)
GND on Bottom Layer "GND_L01_P001" (solid, pour order 1): 139.5,84.5 139.5,175.5 cw(c143.5,175.5) 143.5,179.5 191.5,179.5 cw(c191.5,178.5) 192.5,178.5 ccw(c202,178.5) 211.5,178.5 cw(c212.5,178.5) 212.5,179.5 222,179.5 cw(c222,175.5) 226,175.5 226,84.504 225.996,84.504 cw(c221.996,84.504) 221.996,80.504 221.996,80.5 143.5,80.5 cw(c143.5,84.5)

## Keep-outs
Keep-Out Layer:
  lines w0.254: 221.996,80.5 143.5,80.5 cw(c143.5,84.5) 139.5,84.5 139.5,175.5 cw(c143.5,175.5) 143.5,179.5 191.5,179.5 cw(c191.5,178.5) 192.5,178.5 ccw(c202,178.5) 211.5,178.5 cw(c212.5,178.5) 212.5,179.5 222,179.5 cw(c222,175.5) 226,175.5 226,84.504 ; 221.996,80.504 ccw(c221.996,84.504) 225.996,84.504

## Silkscreen, mask and mechanical layers (free items; w line width, h text height)
Top Overlay:
  text "Delta Regulator" at 166.754,122.762 h1.52
  text "GND" at 221.254,102.254 h1.52
  text "CAN" at 222.746,96.254 h1.52 r90
Bottom Overlay:
  text "Brake Chamber Test PCB / Rev 1, June 2022 / Kaushik Varma Rudraraju" at 150.5,139 h1.52 r90
  text "Bat+" at 222.709,128.1 h1
  text "5V" at 222.633,126.1 h1
  text "3V3" at 222.709,124.1 h1
  text "SDA" at 222.556,122.6 h1
  text "SCL" at 222.861,118.6 h1
  text "CANTX" at 222.709,115.322 h1
  text "CANRX" at 222.709,112.767 h1
  text "RX" at 222.709,110.211 h1
  text "TX" at 222.81,108.6 h1
  text "GND" at 222.709,105.1 h1
  text "GND" at 222.746,100.254 h1
  text "CANL" at 222.746,97.754 h1
  text "CANH" at 222.746,95.254 h1
Mechanical 1:
  lines w0.254: 98,47 306,47 306,180 98,180 98,47

## Dimensions
222.261,137.275 to 306,180 on Mechanical 1
222.261,137.275 to 306,180 on Mechanical 1
192.5,178.5 to 211.5,178.5 on Mechanical 1
222.261,137.275 to 202,175.5 on Mechanical 1
222.261,137.275 to 220.5,179.5 on Mechanical 1
226,84.504 to 139.5,84.5 on Mechanical 1

## Text inside footprints (layer, text, board x,y; h text height)
EC1: Top Overlay "+" at 164.9,146.15 h1.02 r90; Top Overlay "-" at 165,164.35 h1.02 r90; Bottom Overlay "-" at 163.3,158.75 h1.02 r90; Bottom Overlay "+" at 163.2,152.95 h1.02 r90
EC2: Top Overlay "+" at 148.4,145.9 h1.02 r90; Top Overlay "-" at 148.5,164.1 h1.02 r90; Bottom Overlay "-" at 146.8,158.5 h1.02 r90; Bottom Overlay "+" at 146.7,152.7 h1.02 r90
J2: Top Overlay "Bat+" at 152.025,164.46 h1; Top Overlay "Bat-" at 156.5,164.5 h1
J3: Top Overlay "2" at 208.273,167.54 h1.52 r90; Top Overlay "1" at 213.48,167.54 h1.52 r90
J4: Top Overlay "2" at 151.496,89.665 h1.52; Top Overlay "3" at 159.497,94.999 h1.52; Top Overlay "1" at 159.751,89.665 h1.52
J8: Top Overlay "5" at 215,101 h1.52; Top Overlay "4" at 197.617,93.52 h1.52; Top Overlay "Molex  / 39-30-1080" at 195.5,81.5 h1.52; Top Overlay "8" at 201,101.5 h1.52; Top Overlay "1" at 216.54,93.52 h1.52
J12: Top Overlay "7" at 195.5,97.5 h1.52; Top Overlay "12" at 168.481,98.981 h1.52; Top Overlay "6" at 169.497,93.393 h1.52; Top Overlay "1" at 196.04,93.52 h1.52; Top Overlay "Molex 39-30-0120" at 170.5,90 h1.52
J22: Top Overlay "12" at 158.227,99.851 h1.52 r270; Top Overlay "1" at 153.02,99.851 h1.52 r270; Top Overlay "22" at 158.608,148.746 h1.52 r270; Top Overlay "11" at 153.02,148.111 h1.52 r270; Top Overlay "Molex 39-30-0220" at 148,136.5 h1.52 r270
U1: Top Overlay "On/Off" at 182.117,145.419 h0.76; Top Overlay "Prog." at 182.117,147.959 h0.76; Top Overlay "GND" at 182.117,150.499 h0.76; Top Overlay "3.3V" at 182.117,153.039 h0.76; Top Overlay "Vbat" at 182.117,155.579 h0.76; Top Overlay "D+  D-" at 212.089,153.674 h1.02 r270; Top Overlay "USB" at 210.311,152.658 h1.27 r270; Top Overlay "CAN Rx3 (30)" at 186.943,154.944 h0.76 r270; Top Overlay "CAN Tx3 (31)" at 188.848,154.944 h0.76 r270; Bottom Overlay "RX5" at 200.659,144.489 h1.02 r270; Bottom Overlay "CANTX1" at 203.072,144.362 h1.02 r270; Bottom Overlay "CANRX1" at 205.612,144.362 h1.02 r270; Bottom Overlay "CANTX 3" at 203.072,150.458 h1.02 r270; Bottom Overlay "CANRX 4" at 200.532,150.458 h1.02 r270; Bottom Overlay "GND" at 213.232,154.521 h1.02 r270; Bottom Overlay "RX1 0" at 210.692,152.659 h1.02 r270; Bottom Overlay "RX2 7" at 192.912,152.49 h1.02 r270; Bottom Overlay "TX2 8" at 190.372,152.49 h1.02 r270; Bottom Overlay "MOSI 11" at 182.752,151.134 h1.02 r270; Bottom Overlay "TX1 1" at 208.152,152.997 h1.02 r270; Bottom Overlay "CS 10" at 185.165,152.531 h1.02 r270; Bottom Overlay "2" at 205.612,156.552 h1.02 r270; Bottom Overlay "5" at 197.992,156.552 h1.02 r270; Bottom Overlay "6" at 195.452,156.552 h1.02 r270; Bottom Overlay "TX5" at 197.992,144.532 h1.02 r270; Bottom Overlay "SDA0" at 192.912,144.532 h1.02 r270; Bottom Overlay "SCL0" at 195.452,144.532 h1.02 r270; Bottom Overlay "16 A2" at 187.832,144.532 h1.02 r270; Bottom Overlay "Vin" at 213.232,144.532 h1.02 r270; Bottom Overlay "17 A3" at 190.372,144.532 h1.02 r270; Bottom Overlay "14 A0" at 182.752,144.532 h1.02 r270; Bottom Overlay "15 A1" at 185.292,144.532 h1.02 r270